# Allegro board AUTO_SAVE.brd
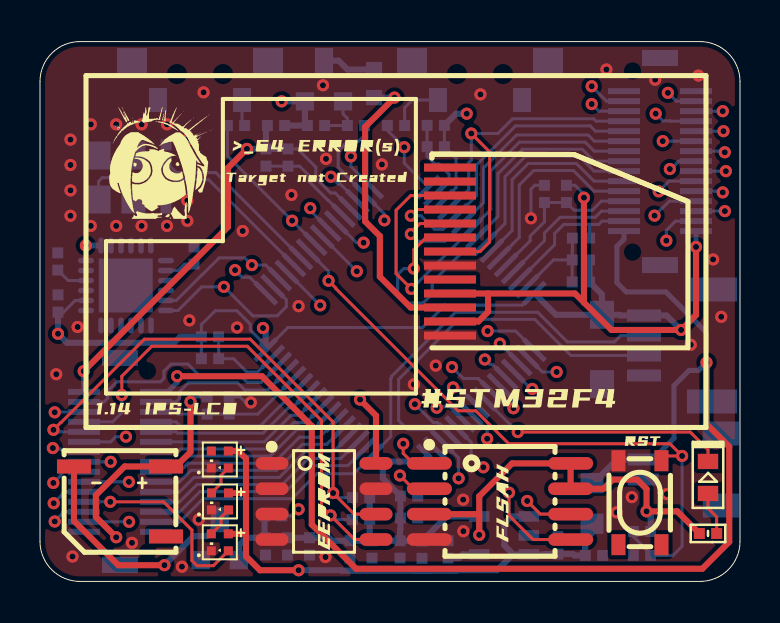
[diagram p0: board, top side]
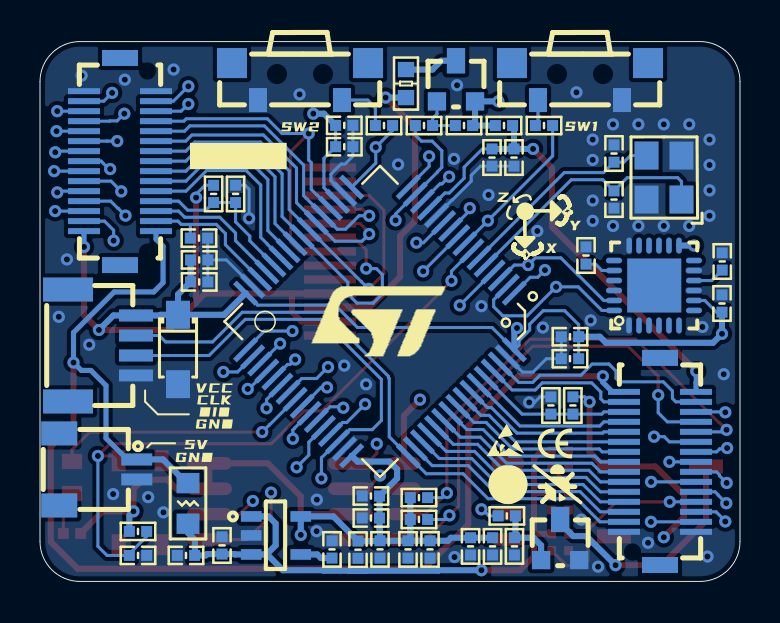
[diagram p1: board, bottom side, seen from below]

Outline 35 x 27 mm; copper layers: TOP, GND, VCC, BOTTOM. Coordinates in mm from the lower left corner of the outline.
Outline path: 0,25 0,2 arc(0.59,0.59) 2,0 33,0 arc(34.41,0.59) 35,2 35,25 arc(34.41,26.41) 33,27 2,27 arc(0.59,26.41) 0,25

## Design rules (mm)
constraint set DEFAULT: min track width 0.152

## Placement (name value [footprint] x y rotation side)
B1  BUZZER  [BUZZER_5X5]  4 4 180 top
C1  0.1uF  [C0402]  25.9 1.8 270 bottom
C2  2.2uF  [C0402]  27.7 1.3 180 bottom
C3  0.1uF  [C0402]  20.4 1.6 270 bottom
C4  2.2uF  [C0402]  19.1 1.59 90 bottom
C5  0.1uF  [C0402]  18 1.6 90 bottom
C6  2.2uF  [C0402]  12.37 1.75 90 bottom
C7  0.1uF  [C0402]  13.47 1.75 90 bottom
C8  2.2uF  [C0402]  16.6 1.6 90 bottom
C9  0.1uF  [C0402]  15.5 1.6 90 bottom
C12  20pF  [C0402]  6.3 19.1 90 bottom
C13  20pF  [C0402]  6.3 21.4 270 bottom
C14  2.2uF  [C0402]  18.45 4.27 180 bottom
C15  0.1uF  [C0402]  27.04 14.98 0 bottom
C16  2.2uF  [C0402]  19.79 22.81 0 bottom
C17  0.1uF  [C0402]  18.45 3.17 180 bottom
C18  2.2uF  [C0402]  27.04 16.08 0 bottom
C19  0.1uF  [C0402]  8.5 11.14 180 bottom
C20  2.2uF  [C0402]  8.5 12.24 180 bottom
C21  0.1uF  [C0402]  19.79 21.74 0 bottom
C22  0.1uF  [C0402]  27.05 17.17 0 bottom
C23  0.1uF  [C0402]  30.1 1.3 180 bottom
C24  0.1uF  [C0402]  7.7 16.3 270 bottom
C25  0.1uF  [C0402]  0.89 16 90 bottom
C26  0.1uF  [C0402]  0.9 13.9 90 bottom
C27  2.2uF  [C0402]  11.3 21.2 90 bottom
C28  0.1uF  [C0402]  12.4 21.2 90 bottom
D1  DSK34  [SOD-123FL]  28.1 11.6 270 bottom
D2  Green  [LED0603]  33.4 5.2 90 top
F1  BSMD0805-100-6V  [R0805]  27.6 3.9 270 bottom
FB1  0R  [R0402]  11.8 22.8 0 bottom
J1  1.0 4P SMD  [CON_1-4P-SMD]  31.9 11.8 270 bottom
J2  1.0 2P SMD  [CON_1-2P-SMD]  32.1 5.6 270 bottom
J3  B2B 30P  [B2B-0_5MM-30P]  4 6 270 bottom
J4  B2B 30P  [B2B-0_5MM-30P]  31 21 90 bottom
NOREF  -  []  11.72 19.39 0 top
NOREF#2  -  []  25.09 21.28 0 top
NOREF#3  -  []  37.91 8.04 0 top
NOREF#4  -  []  14.02 22.05 0 top
NOREF#5  -  []  5.74 21.55 0 top
NOREF#6  -  []  29.54 10.71 0 top
NOREF#7  -  []  -5.91 4.03 0 top
NOREF#8  -  []  37.49 3.93 0 top
NOREF#9  -  []  -3.82 16.95 0 top
NOREF#10  -  []  39.72 4.75 0 top
NOREF#11  -  []  39.66 7.12 0 top
NOREF#12  -  []  8.25 18.26 0 top
NOREF#13  -  []  23.84 9.1 0 top
NOREF#14  -  []  21.92 22.74 0 top
NOREF#15  -  []  14.03 20.47 0 top
NOREF#16  -  []  7.87 22.77 0 top
NOREF#17  -  []  38.02 7.14 0 top
NOREF#18  -  []  26.65 8.41 0 top
NOREF#19  -  []  9.25 16.76 0 top
NOREF#20  -  []  28.97 8.81 0 top
NOREF#21  -  []  -3.43 6.26 0 top
NOREF#22  -  []  17.97 12.92 0 top
NOREF#23  -  []  13.28 -2.21 0 top
NOREF#24  -  []  23.75 -2.78 0 top
NOREF#25  -  []  6.34 8.65 0 top
NOREF#26  -  []  37.83 8.82 0 top
Q1  SS8550  [SOT-23]  14.2 25 180 bottom
Q2  AO3402A  [SOT-23]  8.99 2.06 180 bottom
R1  10R  [R0402]  11.66 3.28 0 bottom
R2  10K  [R0402]  11.28 1.75 90 bottom
R3  4.7K  [R0402]  16.05 4.19 0 bottom
R4  4.7K  [R0402]  16.05 3.1 0 bottom
R5  1K  [R0402]  15.8 22.8 180 bottom
R6  10K  [R0402]  13.8 22.8 0 bottom
R7  10R  [R0603]  16.7 24.9 270 bottom
R8  470R  [R0402]  33.4 2.4 0 top
R9  4.7K(NC)  [R0402]  8.36 8.8 270 bottom
R10  4.7K  [R0402]  9.46 8.8 270 bottom
R11  1K  [R0402]  30.1 2.5 180 bottom
R12  4.7K(NC)  [R0402]  26.32 19.38 270 bottom
R13  4.7K  [R0402]  25.22 19.38 270 bottom
R14  1K  [R0402]  9.8 22.8 0 bottom
R15  1K  [R0402]  17.8 22.8 0 bottom
RGB1  WS2812  [RGB1010]  8.99 1.96 0 top
RGB2  WS2812  [RGB1010]  9 4 0 top
RGB3  WS2812  [RGB1010]  8.99 6.1 0 top
S1  K1  [KEY_SMD_3X6]  8 25 180 bottom
S2  K2  [KEY_SMD_3X6]  22 25 180 bottom
S4  KEY-SMD  [KEY_SMD_3X4X2_5]  30 3.94 270 top
U1  AT24C64  [SOP-8]  14.2 4 0 top
U2  STM32F411RET6  [LQFP_64]  18 13 315 bottom
U3  TPLP2992IM5X-3.3  [SOT23-5]  23.2 2.3 270 bottom
U4  W25Q128JVSIM  [SOIC-8-208]  23 4 270 top
U5  LCD  [TFT-LCD_13P]  20.5 16.5 180 top
U6  MPU6050  [QFN24-EP-4X4]  4.3 14.8 180 bottom
Y1  25Mhz  [CRYSTAL_SMD3225-4P]  3.8 20.2 90 bottom

## Library data of the parts
B1 = BUZZER_NS
C1-C9 C12-C28 = C
D1 = DIODE SCHOTTKY
D2 = LED
F1 = FUSE
FB1 = L
J1 = CON_6
J2 = CON_4
J3 J4 = CON_2X16
Q1 = Triode-PNP
Q2 = MOSFET-N
R1-R15 = R
RGB1-RGB3 = WS2812
S1 S2 = KEY-SMD-4
S4 = KEY-SMD-4: Tolerance: .TOL; User Part Number: E10S007
U1 = AT24C256C
U2 = STM32F411RET6
U3 = TPLP2992IM5X-3.3
U4 = W25Qxxx
U5 = 1.14 TFT-LCD_13P
U6 = MPU6050
Y1 = CRYSTAL_F

## Footprints (pads in the part's own frame, mm; a bottom-side part is the same pattern mirrored in y, then rotated)
B2B-0_5MM-30P
  rect 0.3x1.6 smd: 1(-3.48,-1.801) 2(-3.48,1.801) 3(-2.979,-1.801) 4(-2.979,1.801) 5(-2.479,-1.801) 6(-2.479,1.801) 7(-1.981,-1.801) 8(-1.981,1.801) 9(-1.481,-1.801) 10(-1.481,1.801) 11(-0.98,-1.801) 12(-0.98,1.801) 13(-0.48,-1.801) 14(-0.48,1.801) 15(0.02,-1.801) 16(0.02,1.801) 17(0.521,-1.801) 18(0.521,1.801) 19(1.021,-1.801) 20(1.021,1.801) 21(1.519,-1.801) 22(1.519,1.801) 23(2.019,-1.801) 24(2.019,1.801) 25(2.52,-1.801) 26(2.52,1.801) 27(3.02,-1.801) 28(3.02,1.801) 29(3.52,-1.801) 30(3.52,1.801)
  rect 0.8x1.801 smd: 31(5.179,0) 32(-5.179,0)
BUZZER_5X5
  rect 1.699x0.701 smd: 1(-2.301,-1.75) 2(2.301,-1.75) 3(-2.301,1.75)
C0402
  rect 0.549x0.549 smd: 1(-0.432,0) 2(0.432,0)
CON_1-2P-SMD
  rect 0.599x1.549 smd: 1(-0.5,1.938) 2(0.5,1.938)
  rect 1.199x1.801 smd: 3(1.801,-1.938) 4(-1.801,-1.938)
CON_1-4P-SMD
  rect 0.599x1.699 smd: 1(-1.501,1.699) 2(-0.5,1.699) 3(0.5,1.699) 4(1.499,1.699)
  rect 1.199x2.499 smd: 5(2.799,-1.699) 6(-2.799,-1.699)
CRYSTAL_SMD3225-4P
  rect 1.399x1.199 smd: 1(-1.1,-0.874) 2(1.1,-0.874) 3(1.1,0.874) 4(-1.1,0.874)
KEY_SMD_3X4X2_5
  rect 1.05x0.7 smd: 1(-2.1,1.075) 2(-2.1,-1.075) 3(2.1,1.075) 4(2.1,-1.075)
KEY_SMD_3X6
  rect 0.899x1.199 smd: 1(-2.101,-0.925) 2(2.101,-0.925)
  rect 1.501x1.501 smd: 3(-3.401,0.925) 4(3.401,0.925)
LED0603
  rect 0.762x1.016 smd: 1(-0.8,0) 2(0.8,0)
LQFP_64
  rect 1.524x0.254 smd: 1(-5.751,3.749) 2(-5.751,3.251) 3(-5.751,2.751) 4(-5.751,2.25) 5(-5.751,1.75) 6(-5.751,1.25) 7(-5.751,0.749) 8(-5.751,0.249) 9(-5.751,-0.249) 10(-5.751,-0.749) 11(-5.751,-1.25) 12(-5.751,-1.75) 13(-5.751,-2.25) 14(-5.751,-2.751) 15(-5.751,-3.251) 16(-5.751,-3.749) 33(5.751,-3.749) 34(5.751,-3.251) 35(5.751,-2.751) 36(5.751,-2.25) 37(5.751,-1.75) 38(5.751,-1.25) 39(5.751,-0.749) 40(5.751,-0.249) 41(5.751,0.249) 42(5.751,0.749) 43(5.751,1.25) 44(5.751,1.75) 45(5.751,2.25) 46(5.751,2.751) 47(5.751,3.251) 48(5.751,3.749)
  rect 0.254x1.524 smd: 17(-3.749,-5.751) 18(-3.251,-5.751) 19(-2.751,-5.751) 20(-2.25,-5.751) 21(-1.75,-5.751) 22(-1.25,-5.751) 23(-0.749,-5.751) 24(-0.249,-5.751) 25(0.249,-5.751) 26(0.749,-5.751) 27(1.25,-5.751) 28(1.75,-5.751) 29(2.25,-5.751) 30(2.751,-5.751) 31(3.251,-5.751) 32(3.749,-5.751) 49(3.749,5.751) 50(3.251,5.751) 51(2.751,5.751) 52(2.25,5.751) 53(1.75,5.751) 54(1.25,5.751) 55(0.749,5.751) 56(0.249,5.751) 57(-0.249,5.751) 58(-0.749,5.751) 59(-1.25,5.751) 60(-1.75,5.751) 61(-2.25,5.751) 62(-2.751,5.751) 63(-3.251,5.751) 64(-3.749,5.751)
QFN24-EP-4X4
  oval 0.279x0.8 smd: 1(-1.25,-1.999) 2(-0.749,-1.999) 3(-0.249,-1.999) 4(0.249,-1.999) 5(0.749,-1.999) 6(1.25,-1.999) 13(1.25,1.999) 14(0.749,1.999) 15(0.249,1.999) 16(-0.249,1.999) 17(-0.749,1.999) 18(-1.242,1.999)
  oval 0.8x0.279 smd: 7(1.999,-1.25) 8(1.999,-0.749) 9(1.999,-0.249) 10(1.999,0.249) 11(1.999,0.749) 12(1.999,1.25) 19(-1.999,1.25) 20(-1.999,0.749) 21(-1.999,0.249) 22(-1.999,-0.249) 23(-1.999,-0.749) 24(-1.999,-1.25)
  rect 2.7x2.7 smd: 25(0.013,0)
R0402
  rect 0.549x0.549 smd: 1(-0.432,0) 2(0.432,0)
R0603
  rect 0.762x0.813 smd: 1(-0.701,0) 2(0.701,0)
R0805
  rect 1.016x1.143 smd: 1(-1.016,0) 2(1.016,0)
RGB1010
  rect 0.45x0.45 smd: 1(0.424,0.424) 2(-0.424,0.424) 3(-0.424,-0.424) 4(0.424,-0.424)
SOD-123FL
  rect 1.399x1.199 smd: 1(1.735,0) 2(-1.735,0)
SOIC-8-208
  oval 0.63x2.25 smd: 1(-1.905,-3.531) 2(-0.635,-3.531) 3(0.635,-3.531) 4(1.905,-3.531) 5(1.905,3.531) 6(0.635,3.531) 7(-0.635,3.531) 8(-1.905,3.531)
SOP-8
  oval 1.651x0.635 smd: 1(-2.601,1.905) 2(-2.601,0.635) 3(-2.601,-0.635) 4(-2.601,-1.905) 5(2.601,-1.905) 6(2.601,-0.635) 7(2.601,0.635) 8(2.601,1.905)
SOT23-5
  rect 0.531x1.031 smd: 1(-0.95,-1.24) 2(0,-1.24) 3(0.95,-1.24) 4(0.95,1.24) 5(-0.95,1.24)
SOT-23
  rect 0.914x0.914 smd: 1(-0.953,-0.991) 2(0.953,-0.991)
  rect 0.914x1.27 smd: 3(0,1.041)
TFT-LCD_13P
  rect 2.601x0.401 smd: 1(0,-4.201) 2(0,-3.5) 3(0,-2.799) 4(0,-2.101) 5(0,-1.399) 6(0,-0.701) 7(0,0) 8(0,0.701) 9(0,1.399) 10(0,2.101) 11(0,2.799) 12(0,3.5) 13(0,4.201)

## Nets
5V: F1.1 J2.1 J3.1 J4.1
5V_F: C1.2 C2.2 F1.2 RGB1.1 RGB2.1 RGB3.1 U3.1 U3.3
GND: C1.1 C2.1 C3.1 C4.1 C5.1 C6.1 C7.1 C8.1 C9.1 C12.1 C13.1 C14.1 C15.1 C16.1 C17.1 C18.1 C19.1 C20.1 C21.1 C22.1 C23.2 C24.1 C25.2 C26.2 C27.1 C28.1 D1.1 J1.4 J2.2 J3.29 J3.30 J4.29 J4.30 Q2.2(S) R2.1 R10.1 R13.1 RGB1.3(VSS) RGB2.3(VSS) RGB3.3(VSS) S1.2 S2.1 S4.2 U1.1 U1.2 U1.3 U1.4 U1.7(WP) U2.12(VSSA) U2.18 U2.31 U2.47 U2.63 U3.2 U4.4 U5.8 U5.13 U6.1 U6.9 U6.11 U6.18 Y1.2 Y1.4
VBAT: J3.6 U2.1
VCC3V3: B1.1 C4.2 C5.2 C6.2 C7.2 C8.2 C9.2 C14.2 C15.2 C16.2 C17.2 C18.2 C19.2 C20.2 C21.2 C26.1 D1.2 FB1.2 J1.1 J4.2 Q1.2(E) R3.2 R4.2 R6.1 R8.1 R9.1 R11.1 R12.1 U1.8 U2.19 U2.32 U2.48 U2.64 U3.5(VOUT) U4.3(WP#(IO2)) U4.7 U4.8 U5.10(VCC) U5.12 U6.8(VLOGIC) U6.13
BEEP: J3.28 R1.2 U2.16
BOOT0: J3.5 R9.2 R10.2 U2.60
KEY1: J3.16 R14.1 U2.8
KEY2: J4.25 R15.1 U2.17
NRST: C23.1 J3.14 R11.2 S4.1 U2.7
OSCIN: C12.2 U2.5 Y1.1
OSCOUT: C13.2 U2.6 Y1.3
PA0: J3.24 RGB1.4 U2.14
PA1: J3.26 R5.1 U2.15
PA4: J4.23 U2.20 U5.7
PA5: J4.21 U2.21 U4.6 U5.4
PA6: J4.19 U2.22 U4.2 U5.5
PA7: J4.17 U2.23 U4.5 U5.3
PA8: J4.14 U2.41
PA9: J4.12 U2.42
PA10: J4.10 U2.43
PA11: J4.8 U2.44
PA12: J4.6 U2.45 U4.1
PA13: J1.3 J4.4 U2.46
PA14: J1.2 J3.27 U2.49
PA15: J3.25 U2.50
PB0: J4.11 U2.26
PB1: J4.9 U2.27
PB2: J4.7 R12.2 R13.2 U2.28
PB3: J3.15 U2.55
PB4: J3.13 U2.56
PB5: J3.11 U2.57
PB6: J3.9 U2.58
PB7: J3.7 U2.59
PB8: J3.3 U2.61
PB9: J3.4 U2.62
PB10: J4.5 U2.29
PB11: C22.2 J4.3 U2.30
PB12: J4.27 U2.33
PB13: J4.28 U2.34
PB14: J4.26 U2.35
PB15: J4.24 U2.36
PC1: J3.18 U2.9
PC2: J3.20 U2.10
PC3: J3.22 U2.11
PC4: J4.15 U2.24 U5.6
PC5: J4.13 U2.25
PC6: J4.22 U2.37
PC7: J4.20 U2.38
PC8: J4.18 U2.39
PC9: D2.2(CATHODE) J4.16 U2.40
PC10: J3.23 U2.51
PC11: J3.21 U2.52
PC12: J3.19 U2.53
PC13: J3.8 R4.1 U1.5 U2.2 U6.24
PC14: J3.10 R3.1 U1.6 U2.3 U6.23
PC15: J3.12 U2.4
PD2: J3.17 U2.54
TFT_LEDK: R7.2 U5.11
VREF: C27.2 C28.2 FB1.1 J3.2 U2.13
N790000: C3.2 U3.4
N791178: Q2.1 R1.1 R2.2
N791348: B1.2 Q2.3
N798251: Q1.1 R5.2 R6.2
N798392: Q1.3 R7.1
N799665: RGB1.2 RGB2.4
N799734: RGB2.2 RGB3.4
N800609: D2.1 R8.2
N818576: C24.2 U6.20
N819365: C25.1 U6.10
N839751: R14.2 S1.1
N839755: R15.2 S2.2

Pads without a net: B1 3; J1 5 6; J2 3 4; J3 31 32; J4 31 32; RGB3 2; S1 3 4; S2 3 4; S4 3 4; U5 1 2 9; U6 2 3 4 5 6 7 12 14 15 16 17 19 21 22 25

## Via types
v1: diameter 0.61, hole 0.305, TOP to BOTTOM, 135 vias

## Routing (per net, layer and track width the routed paths; a pad name or vN(x,y) marks a point on that pad's centre or on a via; arc(x,y) is an arc through that point)
5V: length 65.5
  TOP w0.305: v1(33.32,10.95) 33.32,7.87 34.46,6.74 34.46,1.98 33.12,0.64 15.8,0.64 13.59,2.84 13.59,7.77 11.1,10.26 v1(6.86,10.26)
  BOTTOM w0.254: J2.1 30.64,6.1 31.7,7.16 31.7,9.8 32.46,10.55 32.93,10.55 v1(33.32,10.95) 33.32,12.45 31.29,14.48 29.31,14.48 28.85,14.94 28.85,16.76 29.2,17.12 J4.1 ; J3.1 6.38,9.48 6.86,9.96 v1(6.86,10.26)
  BOTTOM w0.305: F1.1 27.66,4.92 28.85,6.1 J2.1
5V_F: length 30.2
  TOP w0.305: v1(12.93,0.56) 11,0.56 10.3,1.26 10.3,2.39 ; 10.3,4.42 10.3,6.14 9.92,6.52 RGB3.1 ; 10.3,4.42 10.3,4.42 RGB2.1 ; 10.3,4.42 10.3,2.39 ; 10.3,2.39 10.29,2.38 RGB1.1
  BOTTOM w0.305: 23.67,1.35 23.64,1.35 22.85,0.56 20.84,0.56 20.82,0.54 19.54,0.54 19.52,0.53 18.68,0.53 18.67,0.54 15.08,0.54 15.06,0.56 v1(12.93,0.56) ; 23.67,1.35 U3.3 25.23,1.35 25.25,1.37 C1.2 26.65,1.37 26.71,1.3 C2.2 27.25,1.31 27.25,2.08 27.6,2.43 F1.2 ; 23.67,1.35 23.22,1.8 23.22,2.9 23.57,3.25 U3.1
GND: length 22.2
  BOTTOM w0.152: C22.1 26.62,16.57 26.61,16.56 C18.1 ; U2.18 20.45,20.05 20.45,20.37 19.94,20.88 19.74,20.88 19.35,21.26 C21.1 C16.1 ; C27.1 C28.1 12.98,20.77 13.44,20.31 13.44,20.02 14.39,19.07 14.4,19.07 U2.12 ; C18.1 C15.1 ; C18.1 25.68,16.08 U2.31 ; R10.1 10,9.23 10.28,8.95 v1(10.54,8.95) ; U2.63 10.87,10.47 10.35,10.47 9.68,11.14 C19.1 C20.1 ; R13.1 24.74,19.81 24.55,19.62 v1(24.55,18.16)
  vias: v1(0.81,10.36) v1(1.52,22.1) v1(1.52,20.83) v1(1.52,19.56) v1(1.52,18.29) v1(1.63,1.24) v1(1.88,12.73) v1(2.54,22.86) v1(2.54,17.78) v1(3.81,22.86) v1(3.81,17.78) v1(4.6,1.93) v1(5.08,22.86) v1(5.08,17.78) v1(6.35,22.86) v1(6.35,17.78) v1(7.1,0.74) v1(7.37,22.1) v1(7.37,21.08) v1(7.37,19.05) v1(7.37,18.03) v1(7.47,13.06) v1(7.93,3.09) v1(8.18,24.46) v1(9.86,12.7) v1(10.13,17.53) v1(12.57,19.33) v1(12.93,13.77) v1(14.15,24.82) v1(14.3,21.13) v1(14.27,1.22) v1(17.09,20.85) v1(18.69,9.86) v1(19.79,10.79) v1(21.16,4.09) v1(21.17,2.51) v1(22.02,24.36) v1(28.32,25.6) v1(28.83,3.45) v1(29.59,4.22) v1(30.76,25.1) v1(31.34,4.37) v1(32.54,11.84) v1(32.92,25.3) v1(33.66,16.1) v1(34.06,13.23)
VBAT: length 16.7
  VCC w0.152: v1(0.74,8.46) 1.57,8.46 5.51,12.4 8.03,12.4 8.48,12.85 8.48,14.94 9.11,15.57 v1(9.75,15.57)
  BOTTOM w0.152: J3.6 0.76,8.48 v1(0.74,8.46) ; v1(9.75,15.57) 10.11,15.21 10.49,15.21 U2.1
VCC3V3: length 135.8
  TOP w0.305: v1(16,9.09) 16.8,8.29 U1.8 ; 21.96,3.28 21.96,4.26 23.61,5.91 U4.8 U4.7 28.18,4.63 28.64,5.09 29.86,5.09 30.33,4.62 v1(30.33,3.51) 31.86,3.51 R8.1 ; 21.96,3.28 21.87,3.37 U4.3 ; 21.96,3.28 v1(21.96,2.33) ; v1(27.2,19.2) 27.2,13.95 ; 27.2,13.95 28.57,12.58 v1(32.05,12.58) 32.8,13.32 v1(32.8,16.73) ; 27.2,13.95 26.75,14.4 22.4,14.4 ; U5.12 21.92,13 22.4,13.49 22.4,14.4 ; 22.4,14.4 U5.10 ; v1(7.52,8.98) 7.52,6.47 6.8,5.75 B1.1 4.24,5.75 2.79,4.31 2.79,3.23 v1(3.81,2.21)
  BOTTOM w0.152: U2.32 24.12,13.82 20.24,13.82 19.13,12.7 12.4,12.7 U2.64 11.05,11.82 11.05,12.04 10.52,12.57 10.52,12.87 9.84,13.54 8.76,13.54 8.07,12.84 C20.2 C19.2 ; R12.1 26.75,19.81 27.2,19.36 27.2,19.2 v1(27.2,19.2) ; v1(7.52,8.98) 7.77,9.23 R9.1 ; C16.2 C21.2 20.8,21.16 20.8,20.52 20.81,20.52 20.81,19.9 20.8,19.9 20.8,19.69 U2.19 ; U6.8 1.76,14.05 1.17,13.47 C26.1
  BOTTOM w0.254: J4.2 v1(32.8,16.73)
  BOTTOM w0.305: C18.2 C15.2 28.1,14.35 D1.2 ; v1(32.05,12.58) 31.33,13.3 J1.1 29.01,13.3 28.98,13.33 D1.2 ; v1(11.15,12.67) 11.28,12.54 U2.64 ; v1(21.96,2.33) U3.5 20.33,3.25 C4.2 18.01,2.02 C5.2 ; C5.2 18,2.59 18.02,2.61 C17.2 C14.2 17.14,5.15 17.14,5.61 17.53,6 19.13,6 U2.48 ; C5.2 C8.2 ; D1.2 25.8,13.33 U2.32 ; R3.2 R4.2 16.48,2.15 C8.2 ; C16.2 20.8,23.39 v1(21.34,23.39) ; FB1.2 R6.1 13.25,22.92 Q1.2 v1(12.08,24.01) ; C8.2 C9.2 14.61,2.03 14.45,2.18 C7.2 C6.2 ; C20.2 7.01,12.24 6.7,11.93 1.35,11.93 v1(0.9,12.38) C26.1 ; U6.13 v1(2.3,16.8) ; v1(30.33,3.51) 30.53,3.3 R11.1
BEEP: length 36
  VCC w0.152: 12,6.45 13.31,5.14 13.31,4.04 13.29,4.02 13.29,3.97 v1(12.93,3.61) ; 12,6.45 8.99,6.45 5.52,2.98 v1(4.45,2.98) ; 12,6.45 17.96,12.41 17.96,18.34 15.54,20.75 v1(15.54,21.26)
  BOTTOM w0.152: R1.2 12.55,3.28 12.88,3.61 v1(12.93,3.61) ; v1(15.54,21.26) 15.54,20.76 U2.16 ; J3.28 v1(4.45,2.98)
BOOT0: length 7.7
  BOTTOM w0.152: J3.5 6.8,8.48 6.92,8.37 R9.2 R10.2 10.89,8.37 U2.60
KEY1: length 29.6
  VCC w0.152: v1(12.61,18.04) 15.26,15.39 15.26,13.4 12.19,10.34 9.79,10.34 5.55,6.1 3.65,6.1 v1(3.53,5.98)
  BOTTOM w0.152: U2.8 v1(12.61,18.04) 9.37,21.28 R14.1 ; J3.16 v1(3.53,5.98)
KEY2: length 16
  VCC w0.152: v1(18.21,21.72) 25.43,21.72 v1(27.58,23.88)
  BOTTOM w0.152: J4.25 27.94,23.52 v1(27.58,23.88) ; R15.1 17.37,22.56 v1(18.21,21.72) 18.21,20.92 U2.17
NRST: length 53
  TOP w0.152: v1(14.43,15.04) 14.79,14.68 14.79,14.65 20.9,8.53 21.79,8.53 23.44,6.89 31.49,6.89 v1(32.11,6.28) 31.31,6.28 S4.1
  VCC w0.152: v1(0.64,6.67) 3.78,6.67 4,6.45 4.85,6.45 5.36,6.96 5.36,7.7 8.36,10.69 11.84,10.69 14.79,13.64 14.79,14.68 v1(14.43,15.04)
  BOTTOM w0.152: v1(14.43,15.04) 14.43,15.51 U2.7 ; J3.14 1.17,6.48 1.02,6.63 0.69,6.63 v1(0.64,6.67) ; v1(32.11,6.28) 32.11,1.76 31.65,1.3 C23.1 30.53,1.38 29.67,2.24 R11.2
OSCIN: length 13
  BOTTOM w0.152: U2.5 8.43,20.09 6.86,20.09 C12.2 5.64,20.19 3.12,20.19 2.93,20 Y1.1
OSCOUT: length 10.5
  BOTTOM w0.152: Y1.3 5.48,21.3 5.81,20.97 C13.2 6.82,20.45 8.79,20.45 U2.6
PA0: length 37.6
  TOP w0.152: v1(3.51,3.98) 6.18,3.98 7.59,2.57 7.59,1.04 7.85,0.79 8.67,0.79 RGB1.4
  VCC w0.152: v1(3.51,3.98) 5.5,3.98 8.71,7.19 11.73,7.19 17.2,12.65 17.2,16.92 16.51,17.6 16.51,18.38 15.01,19.88 14.9,19.88 v1(14.54,20.24)
  BOTTOM w0.152: v1(14.54,20.24) 14.9,19.88 15.01,19.88 U2.14 ; J3.24 v1(3.51,3.98)
PA1: length 34.7
  VCC w0.152: v1(0.74,3) 1.24,3 1.32,3.07 3.43,3.07 3.92,3.56 5.6,3.56 8.86,6.83 11.88,6.83 17.58,12.54 17.58,17.7 v1(17.22,18.06)
  BOTTOM w0.152: R5.1 16.23,22.32 15.93,22.02 15.39,22.02 14.91,21.54 14.91,20.7 15.13,20.48 15.13,20.47 U2.15 17.22,18.38 v1(17.22,18.06) ; v1(0.74,3) 0.74,3.02 1.19,3.48 J3.26
PA4: length 20.2
  TOP w0.152: v1(21.56,22.4) 22.48,21.49 22.48,16.98 22,16.5 U5.7
  BOTTOM w0.152: U2.20 21.16,19.34 21.17,19.34 21.44,19.61 21.44,20.94 21.56,21.07 v1(21.56,22.4) 22.9,22.4 23.63,23.14 27.69,23.14 27.81,23.02 J4.23
PA5: length 39.9
  TOP w0.152: v1(24.36,4.02) 25.02,3.37 U4.6 ; v1(18.54,18.29) 18.85,18.6 U5.4
  VCC w0.152: v1(18.54,18.29) 19.68,17.14 19.68,12.52 17.58,10.41 17.58,6.6 20.7,3.48 23.81,3.48 v1(24.36,4.02)
  BOTTOM w0.152: J4.21 27.77,22.52 27.51,22.78 23.78,22.78 21.82,20.82 21.82,19.29 U2.21 20.14,17.62 19.72,17.62 19.05,18.29 v1(18.54,18.29)
PA6: length 31.7
  TOP w0.152: v1(18,5.3) 18.66,4.63 U4.2 ; v1(18.54,17.37) 18.54,17.42 18.75,17.63 18.75,17.65 19,17.9 U5.5
  VCC w0.152: v1(18,5.3) 17.2,6.1 17.2,10.54 19.28,12.62 19.28,16.64 v1(18.54,17.37)
  BOTTOM w0.152: v1(18.54,17.37) 18.9,17.01 20.25,17.01 U2.22 22.17,18.94 22.17,20.68 23.83,22.33 27.41,22.33 27.71,22.02 J4.19
PA7: length 48.6
  TOP w0.152: U5.3 18.54,19.3 17.81,18.57 17.81,15.39 v1(18.57,14.63) ; v1(23.45,4.44) 23.45,3.3 24.65,2.1 26.53,2.1
  VCC w0.152: v1(18.57,14.63) 18.57,12.45 16.79,10.67 16.79,5.66 19.34,3.11 24.55,3.11 25.01,3.57 25.01,4.22 24.55,4.67 23.68,4.67 v1(23.45,4.44)
  BOTTOM w0.152: v1(18.57,14.63) 18.93,14.99 18.93,14.99 U2.23 22.54,18.6 22.54,20.54 23.97,21.97 27.26,21.97 27.71,21.52 J4.17
PA8: length 29.9
  VCC w0.152: v1(34.29,20.52) 33.52,20.52 32.97,19.96 31.31,19.96 30.98,20.29 30.34,20.29 28.85,18.8 28.85,18.51 28.17,17.83 28.17,12.6 28.77,12 28.77,9.26 26.37,6.86 23.5,6.86 v1(20.65,9.7)
  BOTTOM w0.152: v1(20.65,9.7) 20.95,9.7 U2.41 ; J4.14 v1(34.29,20.52)
PA9: length 23.8
  VCC w0.152: v1(22.36,7.14) 23.02,6.48 26.49,6.48 29.13,9.12 29.13,12.32 28.52,12.93 28.52,17.6 30.43,19.51 v1(30.94,19.51)
  BOTTOM w0.152: U2.42 22.27,7.67 22.27,7.66 22.36,7.58 v1(22.36,7.14) ; J4.12 31.45,20.02 v1(30.94,19.51)
PA10: length 29.6
  VCC w0.152: v1(19.84,8.69) 22.23,6.29 22.69,6.29 22.83,6.15 22.85,6.15 22.87,6.12 26.64,6.12 29.49,8.97 29.49,12.52 28.88,13.13 28.88,17.3 30.46,18.88 33.05,18.88 33.63,19.46 v1(34.14,19.46)
  BOTTOM w0.152: U2.43 20.5,8.73 19.88,8.73 v1(19.84,8.69) ; J4.10 34.07,19.52 v1(34.14,19.46)
PA11: length 23.7
  VCC w0.152: v1(22.17,5.71) 22.68,5.71 22.73,5.77 26.79,5.77 29.84,8.82 29.84,15.44 30.3,15.89 30.3,17.87 v1(30.73,18.29)
  BOTTOM w0.152: v1(30.73,18.29) 31.09,18.65 31.1,18.65 31.46,19.02 J4.8 ; v1(22.17,5.71) 21.56,6.32 21.56,6.97 U2.44
PA12: length 35.7
  TOP w0.152: U4.1 18.66,5.91 18.16,6.4 v1(18.16,6.88)
  VCC w0.152: v1(34.24,18.52) 31.88,18.52 30.71,17.35 30.71,15.6 30.2,15.09 30.2,8.68 26.93,5.41 22.88,5.41 22.82,5.35 22.81,5.35 22.58,5.12 21.93,5.12 21.92,5.13 21.89,5.13 21.36,5.66 21.36,6.25 v1(18.75,8.86) 18.16,8.28 v1(18.16,6.88)
  BOTTOM w0.152: J4.6 v1(34.24,18.52) ; v1(18.75,8.86) 19.66,7.95 19.87,7.95 U2.45
PA13: length 43.5
  VCC w0.152: v1(31.32,17.04) 31.32,15.62 30.56,14.86 30.56,8.53 27.08,5.05 23.22,5.05 22.89,4.72 21.36,4.72 v1(20.93,5.16)
  BOTTOM w0.152: v1(31.32,17.04) 31.32,17.56 31.78,18.02 J4.4 ; v1(20.93,5.16) 20.93,6.18 U2.46 19.52,7.59 18.39,7.59 17.93,8.05 17.93,10.11 20.93,13.11 24.74,13.11 26.55,11.3 J1.3
PA14: length 31.2
  BOTTOM w0.152: J3.27 7,2.98 8.15,4.14 12.59,4.14 13.84,5.38 15.69,5.38 U2.49 17.54,7.24 17.54,10.15 17.58,10.19 17.58,10.26 20.78,13.46 24.89,13.46 26.37,11.98 28.72,11.98 29.04,12.3 J1.2
PA15: length 11.7
  BOTTOM w0.152: U2.50 15.39,5.79 13.59,5.79 12.29,4.49 8,4.49 6.99,3.48 J3.25
PB0: length 10.3
  BOTTOM w0.152: U2.26 23.61,17.55 23.61,20.1 24.41,20.9 26.82,20.9 27.7,20.02 J4.11
PB1: length 10
  BOTTOM w0.152: J4.9 27.7,19.52 26.67,20.55 24.69,20.55 23.96,19.82 23.96,17.21 23.63,16.88 23.63,16.87 U2.27
PB2: length 8.2
  BOTTOM w0.152: U2.28 24.51,17.04 24.51,17.27 25.22,17.98 R13.2 R12.2 26.7,18.57 27.61,18.57 28.07,19.02 J4.7
PB3: length 9.7
  BOTTOM w0.152: U2.55 13.65,7.59 12.84,7.59 11.52,6.27 7.26,6.27 6.97,5.98 J3.15
PB4: length 9.3
  BOTTOM w0.152: J3.13 6.89,6.48 7.04,6.62 11.37,6.62 12.69,7.95 13.3,7.95 U2.56
PB5: length 8.8
  BOTTOM w0.152: U2.57 12.95,8.31 12.55,8.31 11.22,6.98 J3.11
PB6: length 8.5
  BOTTOM w0.152: U2.58 12.64,8.7 12.43,8.7 11.15,7.42 6.87,7.42 6.8,7.48 J3.9
PB7: length 8.2
  BOTTOM w0.152: U2.59 11.01,7.77 7.01,7.77 6.8,7.98 J3.7
PB8: length 7.7
  BOTTOM w0.152: J3.3 6.8,8.98 6.96,9.13 6.96,9.47 7.42,9.93 9.88,9.93 10.24,9.58 11.39,9.58 U2.61
PB9: length 11.8
  BOTTOM w0.152: U2.62 11.06,9.95 10.36,9.95 10,10.31 7.95,10.31 7.39,10.87 6.55,10.87 6.2,10.52 6.2,10.16 6.02,9.98 3.84,9.98 3.38,9.53 3.38,9.16 3.2,8.98 J3.4 2.21,8.99
PB10: length 7
  BOTTOM w0.152: U2.29 25.22,17.04 25.22,17.42 26.01,18.21 27.76,18.21 28.07,18.52 J4.5
PB11: length 7.4
  BOTTOM w0.152: 27.48,17.86 26.19,17.86 25.73,17.4 25.73,16.84 U2.30 ; 27.48,17.86 C22.2 ; 27.48,17.86 27.94,17.86 28.1,18.02 J4.3
PB12: length 20.9
  VCC w0.152: v1(27.58,24.77) 28.25,24.1 28.25,23.45 25.19,20.39 25.19,18.36 25.3,18.26 25.3,13.44 24.74,12.88 22.74,12.88 v1(22.38,12.52)
  BOTTOM w0.152: J4.27 28.33,24.02 v1(27.58,24.77) ; U2.33 23.78,12.52 v1(22.38,12.52)
PB13: length 20.8
  VCC w0.152: v1(31.39,24.43) 29.74,24.43 25.55,20.24 25.55,18.51 25.65,18.4 25.65,11.16 25.83,10.98 v1(25.83,10.48)
  BOTTOM w0.152: U2.34 25.12,10.48 v1(25.83,10.48) ; v1(31.39,24.43) 31.81,24.02 J4.28
PB14: length 27.3
  VCC w0.152: v1(34.14,23.52) 31.48,23.52 31.03,23.98 29.9,23.98 25.9,19.98 25.9,18.66 26.01,18.55 26.01,11.56 26.47,11.1 26.47,10.24 26.09,9.87 25.53,9.87 23.5,11.9 v1(23,11.9)
  BOTTOM w0.152: J4.26 v1(34.14,23.52) ; U2.35 v1(23,11.9)
PB15: length 22.1
  VCC w0.152: v1(24.61,9.63) 25.27,9.63 25.49,9.41 26.2,9.41 26.82,10.03 26.82,11.25 26.37,11.7 26.37,18.7 26.26,18.81 26.26,19.83 29.82,23.39 v1(30.78,23.39)
  BOTTOM w0.152: U2.36 24.56,9.63 v1(24.61,9.63) ; v1(30.78,23.39) 31.14,23.03 31.5,23.03 31.51,23.02 J4.24
PC1: length 25.3
  VCC w0.152: v1(0.67,4.93) 1.14,5.4 3.85,5.4 4.19,5.74 5.7,5.74 8.21,8.26 11.23,8.26 15.84,12.87 v1(15.84,15.51)
  BOTTOM w0.152: U2.9 v1(15.84,15.51) ; v1(0.67,4.93) 1.03,5.28 1.03,5.33 1.17,5.48 J3.18
PC2: length 26
  VCC w0.152: v1(13.51,18.67) 13.87,18.31 13.87,18.31 16.48,15.69 16.48,13 11.38,7.9 8.36,7.9 5.8,5.34 4.8,5.34 v1(4.45,4.98)
  BOTTOM w0.152: J3.20 v1(4.45,4.98) ; v1(13.51,18.67) 13.51,18.55 U2.10
PC3: length 27.9
  VCC w0.152: v1(16.18,16.94) 16.84,16.28 16.84,12.8 11.58,7.54 8.51,7.54 5.36,4.39 3.92,4.39 3.75,4.56 1.34,4.56 v1(0.69,3.91)
  BOTTOM w0.152: v1(0.69,3.91) 1.09,4.32 1.09,4.33 1.24,4.48 J3.22 ; v1(16.18,16.94) 15.83,16.94 U2.11
PC4: length 21.4
  TOP w0.152: U5.6 19.3,17.2 18.69,16.59 v1(18.69,15.65)
  BOTTOM w0.152: J4.15 27.71,21.02 27.11,21.62 24.12,21.62 22.9,20.39 22.9,18.25 U2.24 19.61,14.96 19.61,14.38 19.15,13.92 18.34,13.92 17.88,14.38 17.88,15.34 18.18,15.65 v1(18.69,15.65)
PC5: length 10.4
  BOTTOM w0.152: J4.13 27.7,20.52 26.96,21.26 24.27,21.26 23.25,20.24 23.25,17.9 U2.25
PC6: length 27.9
  VCC w0.152: v1(22.24,11.1) 22.6,10.74 22.6,10.74 24.33,9.02 26.39,9.02 27.18,9.8 27.18,11.39 26.72,11.85 26.72,18.85 26.61,18.95 26.61,19.68 29.56,22.63 33.55,22.63 33.67,22.52 v1(34.17,22.52)
  BOTTOM w0.152: J4.22 v1(34.17,22.52) ; U2.37 22.62,10.85 22.49,10.85 v1(22.24,11.1)
PC7: length 22.1
  VCC w0.152: v1(31.14,22.02) 30.43,22.02 27.78,19.37 27.78,18.95 27.08,18.25 27.08,12 27.56,11.52 27.56,9.6 26.62,8.66 v1(23.67,8.66)
  BOTTOM w0.152: J4.20 31.65,22.02 31.65,22.02 v1(31.14,22.02) ; v1(23.67,8.66) 23.67,9.09 U2.38
PC8: length 30.3
  VCC w0.152: v1(34.24,21.46) 31.74,21.46 31.61,21.34 30.25,21.34 28.14,19.22 28.14,18.81 27.43,18.1 27.43,12.27 27.97,11.73 27.97,9.47 26.55,8.05 23.26,8.05 v1(20.6,10.72)
  BOTTOM w0.152: U2.39 21.91,10.15 21.17,10.15 v1(20.6,10.72) ; v1(34.24,21.46) 34.18,21.52 J4.18
PC9: length 33.6
  TOP w0.152: D2.2 33.4,6.58 32.51,7.47 v1(23.89,7.47)
  VCC w0.152: v1(23.89,7.47) 26.47,7.47 28.32,9.32 28.32,11.89 27.81,12.4 27.81,17.98 28.49,18.66 28.49,18.95 30.53,20.98 31.13,20.98 v1(31.49,20.62)
  BOTTOM w0.152: J4.16 31.94,21.02 31.55,20.62 v1(31.49,20.62) ; v1(23.89,7.47) 23.53,7.83 23.52,7.83 U2.40
PC10: length 11.3
  BOTTOM w0.152: J3.23 6.98,3.98 7.85,4.85 12.12,4.85 13.42,6.15 15.04,6.15 U2.51
PC11: length 10.9
  BOTTOM w0.152: U2.52 14.68,6.5 13.27,6.5 11.97,5.2 7.7,5.2 6.98,4.48 J3.21
PC12: length 10.5
  BOTTOM w0.152: J3.19 6.98,4.98 7.55,5.56 11.82,5.56 13.12,6.86 14.33,6.86 U2.53
PC13: length 42.7
  TOP w0.152: 16.8,2.1 15.74,2.1 v1(14.53,3.3) 14.07,3.76 14.07,8.05 10.36,11.76 5.59,11.76 4.09,10.26 v1(4.09,9.32)
  VCC w0.152: v1(9.19,14.73) 9.19,12.85 8.38,12.04 5.66,12.04 4.09,10.46 v1(4.09,9.32)
  BOTTOM w0.152: U2.2 12.32,14.08 12.32,13.74 11.86,13.28 10.64,13.28 v1(9.19,14.73) 8.08,14.73 6.9,13.55 6.3,13.55 ; J3.8 3.63,7.98 4.09,8.44 v1(4.09,9.32) ; v1(14.53,3.3) 14.73,3.1 R4.1
PC14: length 51.7
  TOP w0.152: U1.6 15.71,3.37 v1(14.66,4.42) 14.66,7.97 10.51,12.12 5.22,12.12 1.05,7.94 1.03,7.94 v1(0.67,7.58)
  VCC w0.152: v1(10.59,15.82) 11.29,15.82 12.29,14.82 12.29,12.59 11.1,11.4 6.67,11.4 5.92,10.65 5.92,10.08 3.42,7.58 v1(0.67,7.58)
  BOTTOM w0.152: v1(14.66,4.42) 14.88,4.19 R3.1 ; U2.3 11.29,15.82 v1(10.59,15.82) 10.23,16.18 8.96,16.18 8.09,15.31 8.08,15.31 6.81,14.05 6.3,14.05 ; J3.10 0.77,7.48 v1(0.67,7.58)
PC15: length 17.8
  VCC w0.152: v1(14.01,13.81) 11.25,11.05 6.82,11.05 6.27,10.5 6.27,9.94 4.3,7.96 v1(4.3,7.24)
  BOTTOM w0.152: v1(4.3,7.24) 3.79,7.24 3.53,6.98 J3.12 ; U2.4 v1(14.01,13.81)
PD2: length 10.1
  BOTTOM w0.152: U2.54 13.98,7.21 12.97,7.21 11.67,5.91 7.41,5.91 6.97,5.48 J3.17
TFT_LEDK: length 15
  TOP w0.305: U5.11 18.53,13.7 16.99,15.24 16.99,17.27 16.26,18.01 16.26,22.73 v1(17.72,24.2)
  BOTTOM w0.305: 16.7,24.2 v1(17.72,24.2)
VREF: length 23.5
  TOP w0.305: v1(10.35,21.63) 9.4,20.68 9.4,17.73 v1(2.18,10.52)
  BOTTOM w0.152: U2.13 14.76,19.43 14.53,19.43 13.79,20.17 13.79,20.72 12.88,21.63 C28.2
  BOTTOM w0.254: v1(2.18,10.52) 2.18,9.96 2.2,9.94 J3.2
  BOTTOM w0.305: FB1.1 11.3,22.73 C27.2 ; C27.2 v1(10.35,21.63) ; C27.2 C28.2
N790000: length 1.6
  BOTTOM w0.305: C3.2 20.95,1.17 21.14,1.35 U3.4
N791178: length 3.3
  BOTTOM w0.305: Q2.1 9.94,1.8 10.33,2.18 R2.2 11.23,2.24 R1.1
N791348: length 12
  TOP w0.305: v1(6.22,0.81) 3.91,0.81 1.7,3.03 B1.2
  BOTTOM w0.305: v1(6.22,0.81) 7.68,2.27 8.34,2.27 8.99,2.92 Q2.3
N798251: length 2.4
  BOTTOM w0.152: R6.2 R5.2 15.37,23.16 15.15,23.38 Q1.1
N798392: length 2.7
  BOTTOM w0.305: R7.1 15.38,25.6 14.94,26.04 Q1.3
N799665: length 1.6
  TOP w0.152: RGB1.2 9.06,2.87 9.06,3.21 RGB2.4
N799734: length 1.6
  TOP w0.152: RGB2.2 9.05,4.9 9.05,5.3 RGB3.4
N800609: length 2.2
  TOP w0.152: D2.1 33.4,3.66 33.83,3.23 R8.2
N818576: length 1.5
  BOTTOM w0.152: 6.3,15.55 6.9,15.55 7.22,15.87 C24.2
N819365: length 1.6
  BOTTOM w0.152: U6.10 1.41,15.05 C25.1
N839751: length 1.3
  BOTTOM w0.152: R14.2 10.1,22.93 S1.1
N839755: length 2.7
  BOTTOM w0.152: R15.2 18.23,23.69 18.61,24.08 S2.2

## Copper pours and planes (outline as drawn; the poured copper is in the pictures)
GND on TOP: 0.25,25 0.77,26.23 2,26.75 33,26.75 34.23,26.23 34.75,25 34.75,2 34.23,0.77 33,0.25 2,0.25 0.77,0.77 0.25,2 ; 5 cut-outs
GND on BOTTOM: 34.75,2 34.23,0.77 33,0.25 2,0.25 0.77,0.77 0.25,2 0.25,25 0.77,26.23 2,26.75 33,26.75 34.23,26.23 34.75,25 ; 12 cut-outs
GND on GND: 34.75,2 34.23,0.77 33,0.25 2,0.25 0.77,0.77 0.25,2 0.25,25 0.77,26.23 2,26.75 33,26.75 34.23,26.23 34.75,25
VCC3V3 on VCC: 34.75,2 34.23,0.77 33,0.25 2,0.25 0.77,0.77 0.25,2 0.25,25 0.77,26.23 2,26.75 33,26.75 34.23,26.23 34.75,25 ; 25 cut-outs
